# Altium PCB EJ3_pcb.PcbDoc
Units mm, origin at the board's own origin, x right, y up, seen from the top; angles counter-clockwise.
Board outline 43.43 x 45.85 mm, 2 copper layers (Top Layer, Bottom Layer); 22 components, 16 nets, 64 pads, 0 vias.
Unrouted connection lines stored in the file: 1.
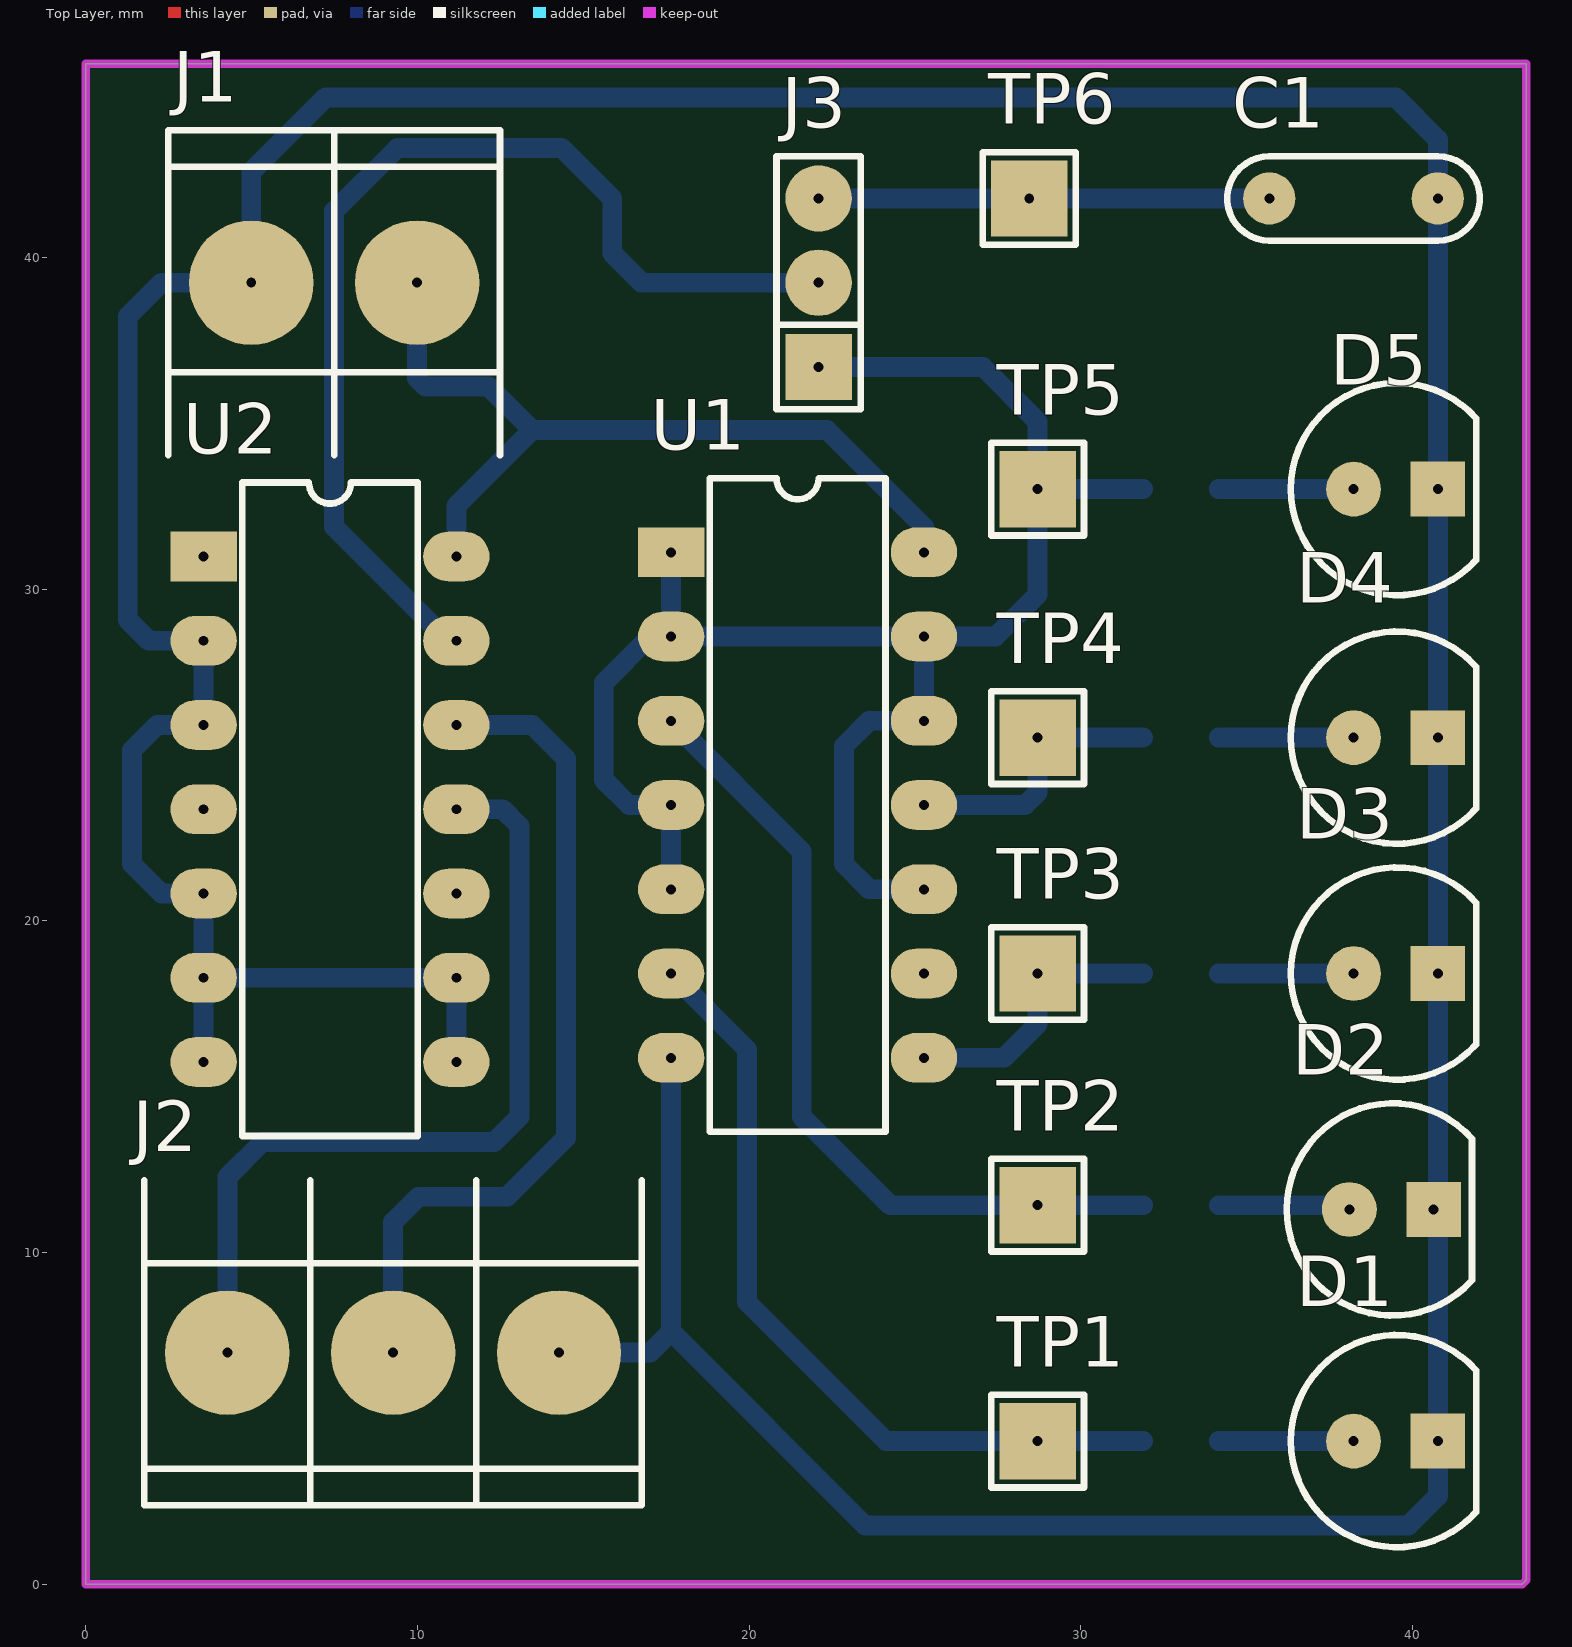
[diagram p0: Top Layer view]
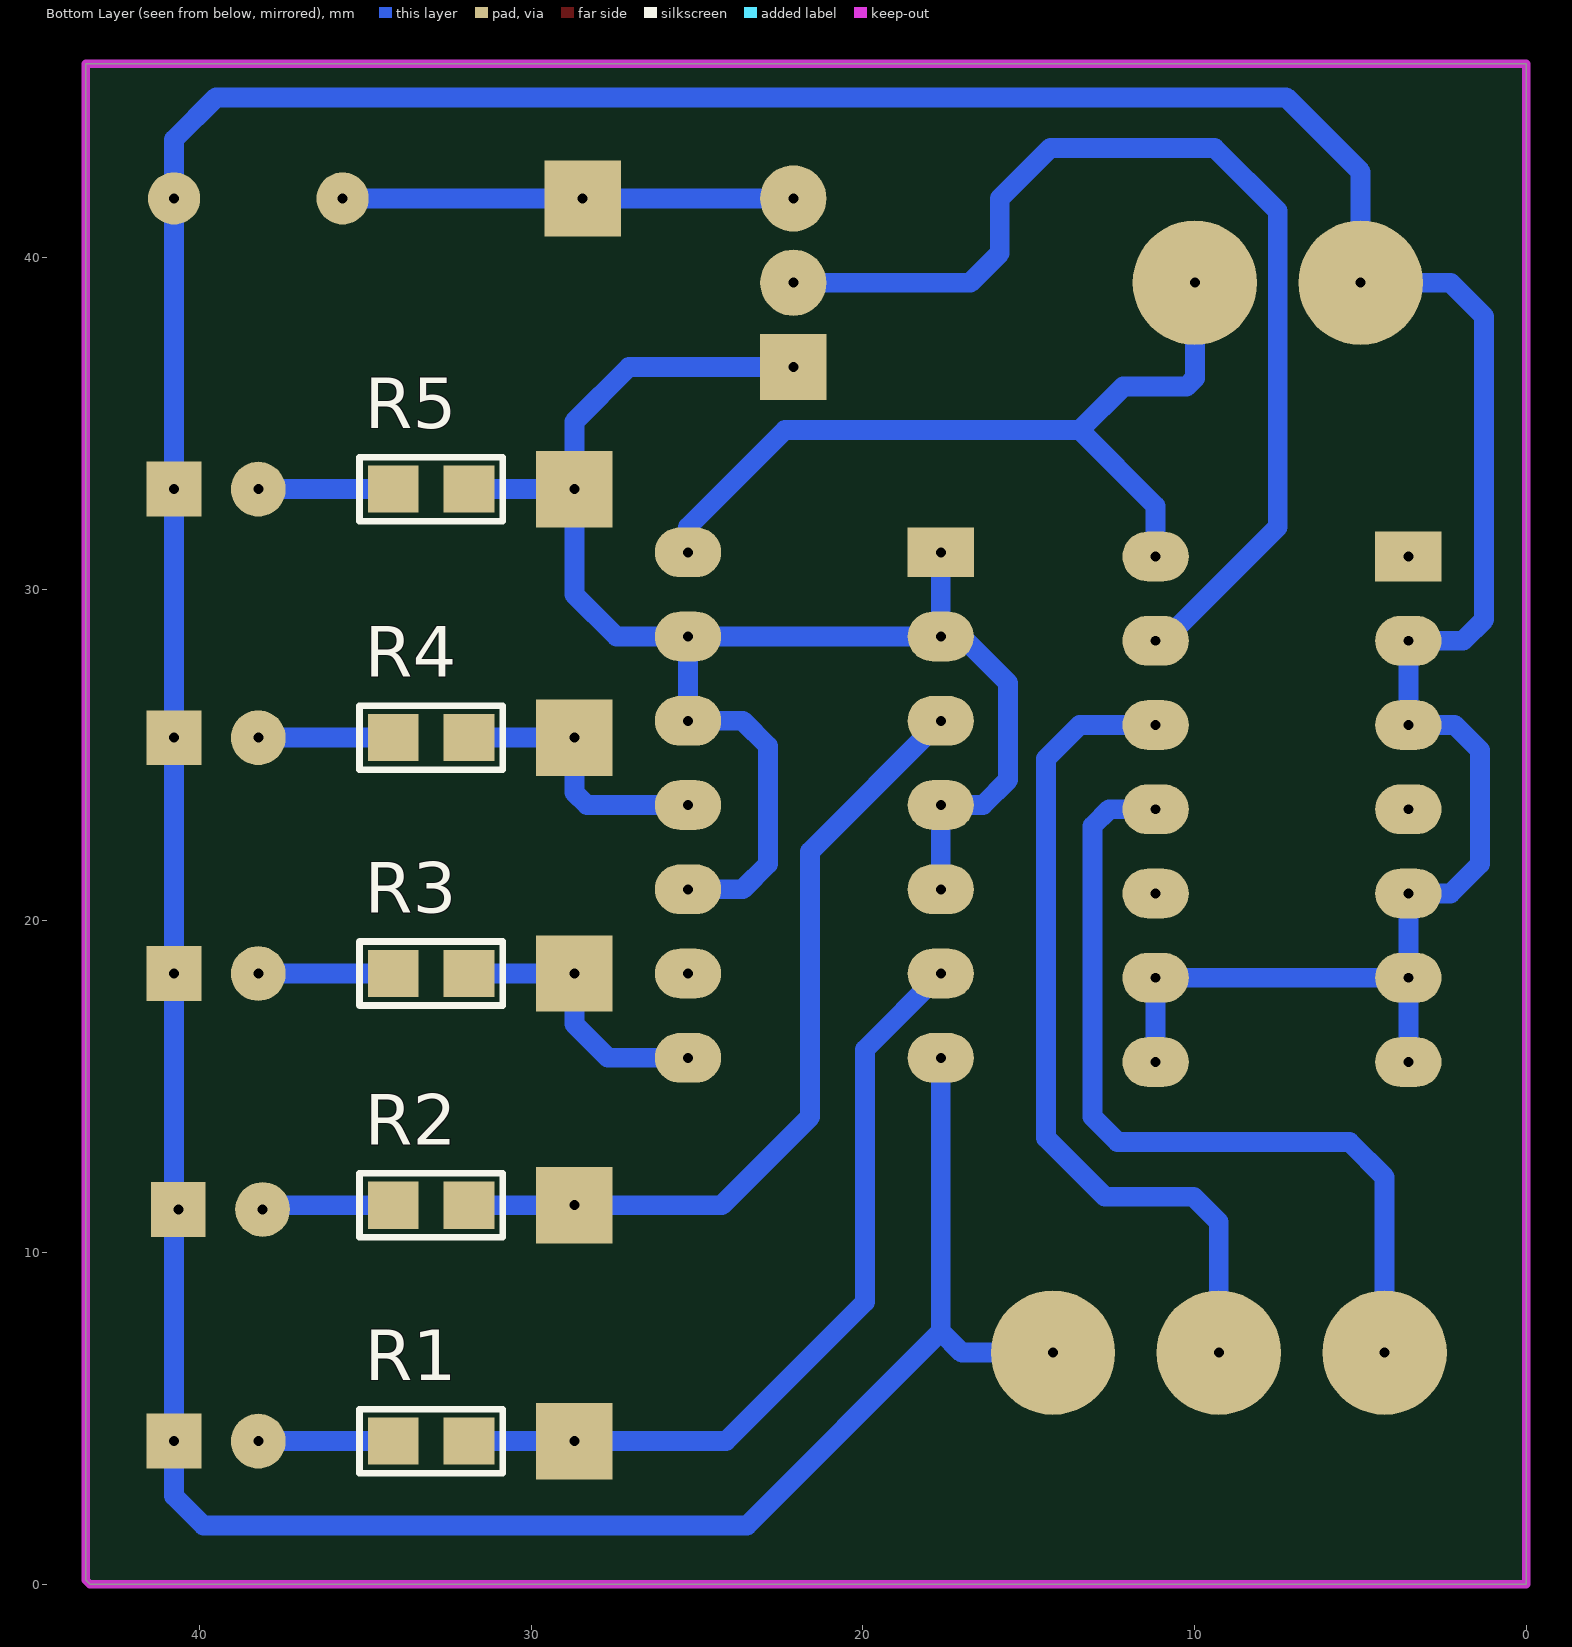
[diagram p1: Bottom Layer view, seen from below]
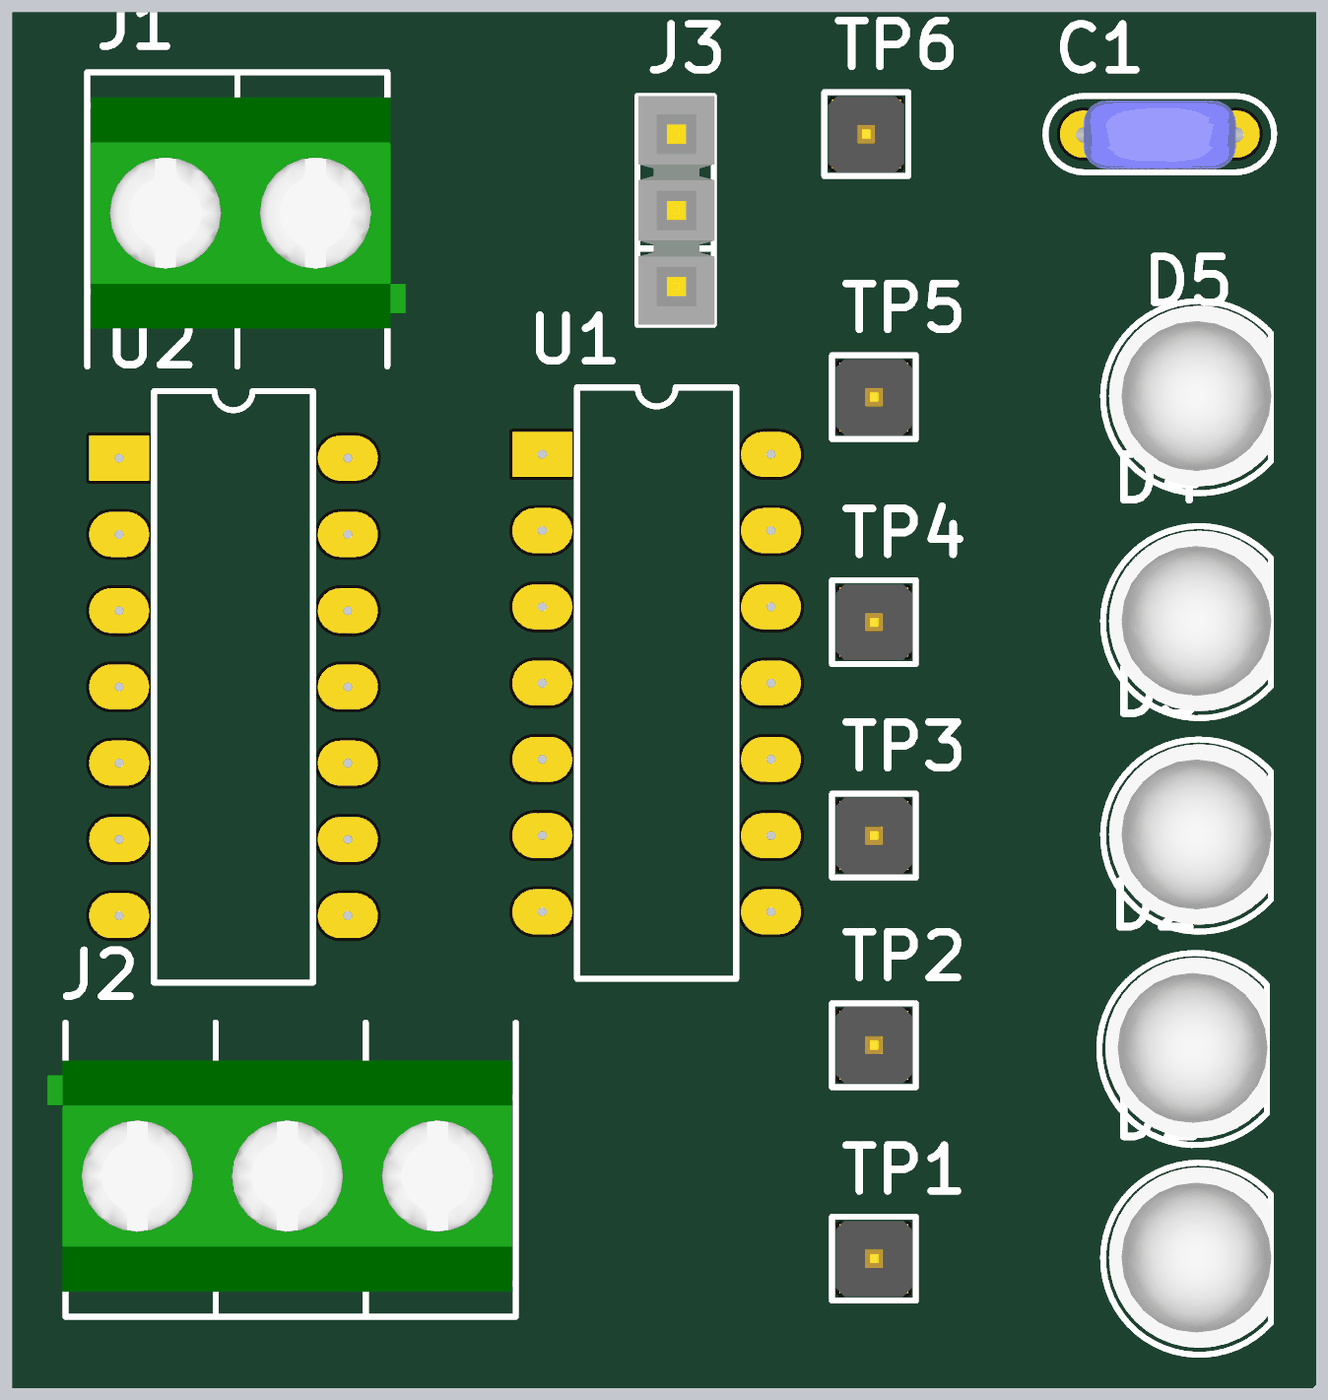
[diagram p2: 3D render of the assembled board from above, using the file's embedded part models]
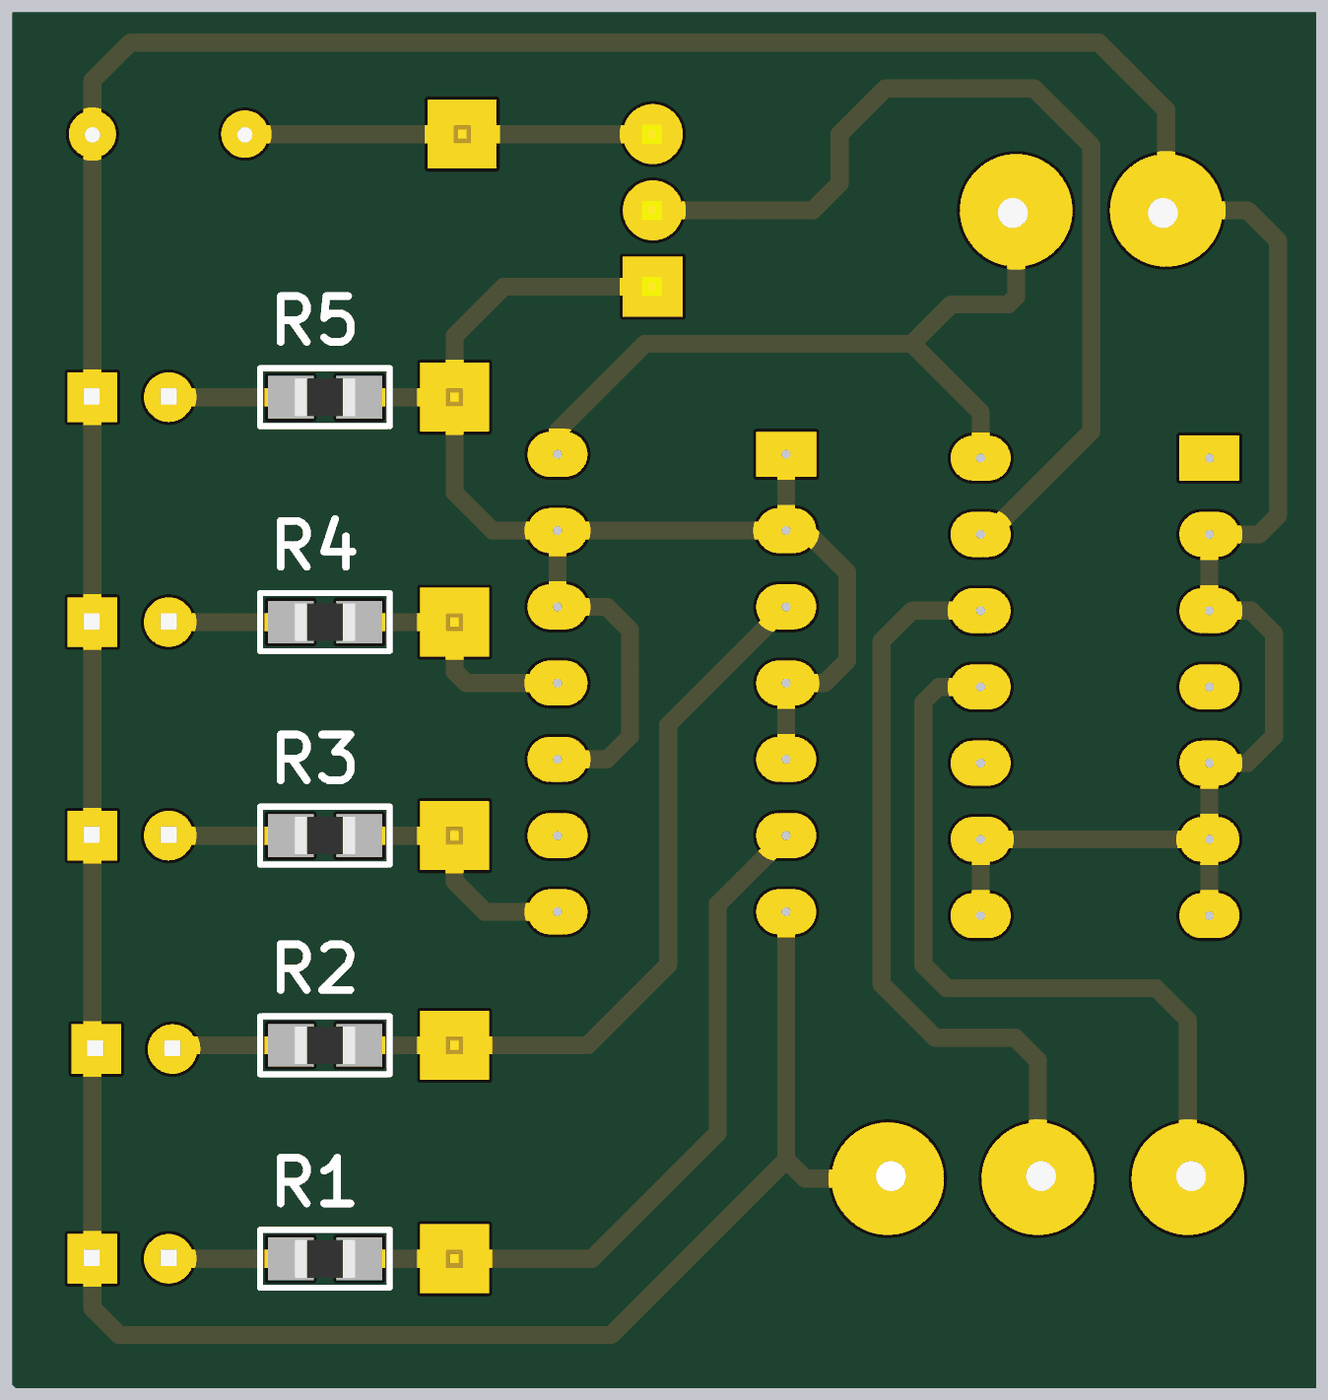
[diagram p3: 3D render of the assembled board from below, using the file's embedded part models]

## Layer stack, top to bottom
Top Solder: solder mask 0.0102, Solder Resist, Dk 3.5
Top Layer: signal copper 0.0356
Dielectric 1: dielectric 0.32, FR-4, Dk 4.8
Bottom Layer: signal copper 0.0356
Bottom Solder: solder mask 0.0102, Solder Resist, Dk 3.5

## Board outline
0,0 0,45.847 43.434,45.847 43.434,0.127 43.307,0

## Design rules (kind name [scope] priority, off if disabled: settings)
Clearance [All] p1: gap=0.254 ignorepadtopadclearanceinfootprint=FALSE except(0: Arc-Hole Track-Hole SMDPad-Hole THPad-Hole Via-Hole Fill-Hole Poly-Hole Region-Hole Text-Hole)
PolygonConnect [All] p1: connectstyle=Relief reliefconductorwidth=0.254 reliefentries=4 polygonreliefangle="90 Angle" airgapwidth=0.254
RoutingVias [All] p1: holewidth=0.711 width=1.27 viastyle="Through Hole" minholewidth=0.711 minwidth=1.27 maxholewidth=0.711 maxwidth=1.27
SolderMaskExpansion [All] p1: expansion=0.102
Width [All] p1: maxlimit=0.6 minlimit=0.6 preferedwidth=0.6
30 further rules are at their usual default settings.

## Components (designator, comment, footprint, x,y, rotation, side; value= is the part's Value field where it differs from the comment)
C1 "CAP" CAP200 38.227,41.783 r0 top
D1 "LED" LED5 39.497,4.318 r0 top
D2 "LED" LED5 39.37,11.303 r0 top
D3 "LED" LED5 39.497,18.415 r0 top
D4 "LED" LED5 39.497,25.527 r0 top
D5 "LED" LED5 39.497,33.02 r0 top
J1 "BORNERA 2" BORNERA2 7.493,39.243 r270 top
J2 "BORNERA 3" BORNERA3 9.271,6.985 r90 top
J3 "CON3" SIP3 22.098,39.243 r90 top
R1 "RES" 0805 33.02,4.318 r0 bottom
R2 "RES" 0805 33.02,11.43 r0 bottom
R3 "RES" 0805 33.02,18.415 r0 bottom
R4 "RES" 0805 33.02,25.527 r0 bottom
R5 "RES" 0805 33.02,33.02 r0 bottom
TP1 "TP" TPTH 28.702,4.318 r0 top
TP2 "TP" TPTH 28.702,11.43 r0 top
TP3 "TP" TPTH 28.702,18.415 r0 top
TP4 "TP" TPTH 28.702,25.527 r0 top
TP5 "TP" TPTH 28.702,33.02 r0 top
TP6 "TP" TPTH 28.448,41.783 r0 top
U1 "SN74LS00N" N014 21.463,23.495 r270 top
U2 "SN74HC02N" N014 7.366,23.368 r270 top

## Footprints (in the part's own frame and the unit in brackets; to place one, negate y for a bottom-side part, rotate by r counter-clockwise, add the part's x,y. Pads: shape width x height; smd on the part's side, far side on the other; paste and mask are expansions set on the pad)
0805 [mil] "Pasivo 0805"
  rect 60x56 smd: 1(-45,0) 2(45,0)
  silkscreen extent -85,-38 85,38, body extent -39,-24 39,25, height 15
BORNERA2 [mm] "Bornera con Tornillos 5mm separación"
  round 3.75 hole 0.3: 1(0,2.5) 2(0,-2.5)
  silkscreen extent -4.6,-5 5.2,5, body extent -3.76,-4.89 3.94,5.61, height 10
BORNERA3 [mm] "Bornera con Tornillos 5mm separación"
  round 3.75 hole 0.3: 1(0,5) 2(0,0) 3(0,-5)
  silkscreen extent -4.6,-7.5 5.2,7.5, body extent -3.76,-7.39 3.94,8.11, height 10.05
CAP200 [mil]
  round 62 hole 11.81: 1(-100,0) 2(100,0)
  silkscreen extent -150,-50 150,50, body extent -110,-46 110,44, height 246
LED5 [mil]
  round 65 hole 11.81: 1(-50,0)
  rect 65x65 hole 11.81: 2(50,0)
  silkscreen extent -124,-126 96,126, body extent -117,-117 97,120, height 485
N014 [mm] "DIP; 14 Leads; Row Spacing 7.62 mm; Pitch 2.54 mm"
  rect 1.5x2 hole 0.3: 1(-7.62,-3.81)
  oval 1.5x2 hole 0.3: 2(-5.08,-3.81) 3(-2.54,-3.81) 4(0,-3.81) 5(2.54,-3.81) 6(5.08,-3.81) 7(7.62,-3.81) 8(7.62,3.81) 9(5.08,3.81) 10(2.54,3.81) 11(0,3.81) 12(-2.54,3.81) 13(-5.08,3.81) 14(-7.62,3.81)
  silkscreen extent -9.85,-2.65 9.85,2.65
SIP3 [mm]
  rect 2x2 hole 0.3: 1(-2.54,0)
  round 2 hole 0.3: 2(0,0) 3(2.54,0)
  silkscreen extent -3.81,-1.27 3.81,1.27, body extent -3.81,-1.3 3.81,1.24, height 8.38
TPTH [mm]
  rect 2.3x2.3 hole 0.3: 1(0,0)
  silkscreen extent -1.4,-1.4 1.4,1.4, body extent -1.27,-1.27 1.27,1.27, height 6.04

## Part data
U1: "Quadruple 2-Input Positive-NAND Gate", ComponentLink1Description="Manufacturer Link", ComponentLink1URL=http://www.ti.com/, ComponentLink2Description=Datasheet, ComponentLink2URL=http://www-s.ti.com/sc/ds/sn74ls00.pdf, DatasheetVersion=Mar-1988, LatestRevisionDate=04-Mar-2005, LatestRevisionNote="Stylized 3D Model Added.", PackageDescription="DIP; 14 Leads; Row Spacing 7.62 mm; Pitch 2.54 mm", PackageReference=N014, PackageVersion=Oct-1995, Published=8-Jun-2000, Publisher="Altium Limited"
U2: "Quadruple 2-Input Positive-NOR Gate", ComponentLink1Description="Manufacturer Link", ComponentLink1URL=http://www.ti.com/, ComponentLink2Description=Datasheet, ComponentLink2URL=http://www-s.ti.com/sc/ds/sn74hc02.pdf, DatasheetVersion=May-1997, LatestRevisionDate=04-Mar-2005, LatestRevisionNote="Stylized 3D Model Added.", PackageDescription="DIP; 14 Leads; Row Spacing 7.62 mm; Pitch 2.54 mm", PackageReference=N014, PackageVersion=Oct-1995, Published=8-Jun-2000, Publisher="Altium Limited"

## Nets (pads, with @x,y where several pads share a name; then routed paths per layer and width w, separated by ;. In a path a pad name is that pad's centre, name@x,y a point inside that pad or via, vN(x,y) a via of type N, cw(c..) or ccw(c..) an arc to the next point about the centre after c; other vN are vias at no path point)
CAP: C1.1 J3.3 TP6.1 | length 13.6
  Bottom Layer w0.6: J3.3 TP6.1 C1.1
COMP: J3.2 U2.13 | length 32.7
  Bottom Layer w0.6: U2.13 10.922,28.448 7.493,31.877 7.493,41.402 9.398,43.307 14.351,43.307 15.875,41.783 15.875,40.132 16.764,39.243 J3.2
GND: C1.2 D1.2 D2.2 D3.2 D4.2 D5.2 J1.2 J2.3 U1.7 U2.2 U2.3 U2.5 U2.6 U2.7 U2.8 U2.9 | length 161.3
  Bottom Layer w0.6: U2.7 U2.6 ; U2.8 U2.9 U2.6 ; J2.3 17.018,6.985 17.653,7.62 ; U1.7 17.653,7.62 ; U2.6 U2.5 2.286,20.828 1.397,21.717 1.397,25.146 2.159,25.908 U2.3 U2.2 1.905,28.448 1.27,29.083 1.27,38.227 2.286,39.243 J1.2 4.993,42.585 7.239,44.831 39.497,44.831 40.767,43.561 C1.2 D5.2 D4.2 D3.2 D1.2 40.767,2.667 39.878,1.778 23.495,1.778 17.653,7.62
IN1: J2.1 U2.11 | length 25.7
  Bottom Layer w0.6: J2.1 4.271,12.272 5.334,13.335 12.319,13.335 13.081,14.097 13.081,22.86 12.573,23.368 U2.11
IN2: J2.2 U2.12 | length 25.3
  Bottom Layer w0.6: J2.2 9.271,10.922 10.033,11.684 12.7,11.684 14.478,13.462 14.478,24.892 13.462,25.908 U2.12
LOAD: J3.1 R5.1 TP5.1 U1.1 U1.2 U1.4 U1.5 U1.9 U1.10 U1.12 U1.13 | length 51.8
  Bottom Layer w0.6: U1.5 U1.4 16.383,23.495 15.621,24.257 15.621,27.178 17.018,28.575 U1.2 ; U1.1 U1.2 ; J3.1 27.051,36.703 28.702,35.052 TP5.1 ; U1.10 23.622,20.955 22.86,21.717 22.86,25.273 23.622,26.035 U1.12 U1.13 ; R5.1 TP5.1 ; U1.2 U1.13 ; U1.13 27.432,28.575 28.702,29.845 TP5.1
NetD1_1: D1.1 R1.2 | length 4.1
  Bottom Layer w0.6: R1.2 D1.1
NetD2_1: D2.1 R2.2 | length 4
  Bottom Layer w0.6: R2.2 37.973,11.43 D2.1
NetD3_1: D3.1 R3.2 | length 4.1
  Bottom Layer w0.6: R3.2 D3.1
NetD4_1: D4.1 R4.2 | length 4.1
  Bottom Layer w0.6: R4.2 D4.1
NetD5_1: D5.1 R5.2 | length 4.1
  Bottom Layer w0.6: R5.2 D5.1
NetR1_1: R1.1 TP1.1 U1.6 | length 24.5
  Bottom Layer w0.6: U1.6 19.939,16.129 19.939,8.509 24.13,4.318 TP1.1 R1.1
NetR2_1: R2.1 TP2.1 U1.3 | length 25
  Bottom Layer w0.6: U1.3 21.59,22.098 21.59,14.097 24.257,11.43 TP2.1 R2.1
NetR3_1: R3.1 TP3.1 U1.8 | length 8.5
  Bottom Layer w0.6: U1.8 27.686,15.875 28.702,16.891 TP3.1 R3.1
NetR4_1: R4.1 TP4.1 U1.11 | length 8.4
  Bottom Layer w0.6: U1.11 28.321,23.495 28.702,23.876 TP4.1 R4.1
VCC: J1.1 U1.14 U2.14 | length 25.5
  Bottom Layer w0.6: J1.1 9.993,36.362 10.247,36.108 12.152,36.108 13.462,34.798 ; U2.14 11.176,32.512 13.462,34.798 ; U1.14 25.273,31.877 22.352,34.798 13.462,34.798
pads on no net: U2.1 U2.4 U2.10

## Keep-outs
Keep-Out Layer:
  lines w0.254: 0,0 43.307,0 43.434,0.127 43.434,6.566 43.434,43.434 43.434,45.847 37.433,45.847 12.478,45.847 0,45.847 0,0